# Altium PCB PCB1.PcbDoc
Units mil, origin at the board's own origin, x right, y up, seen from the top; angles counter-clockwise.
Board outline 6000 x 4000 mil, 2 copper layers (Top Layer, Bottom Layer); 33 components, 32 nets, 110 pads, 0 vias.
Unrouted connection lines stored in the file: 75.
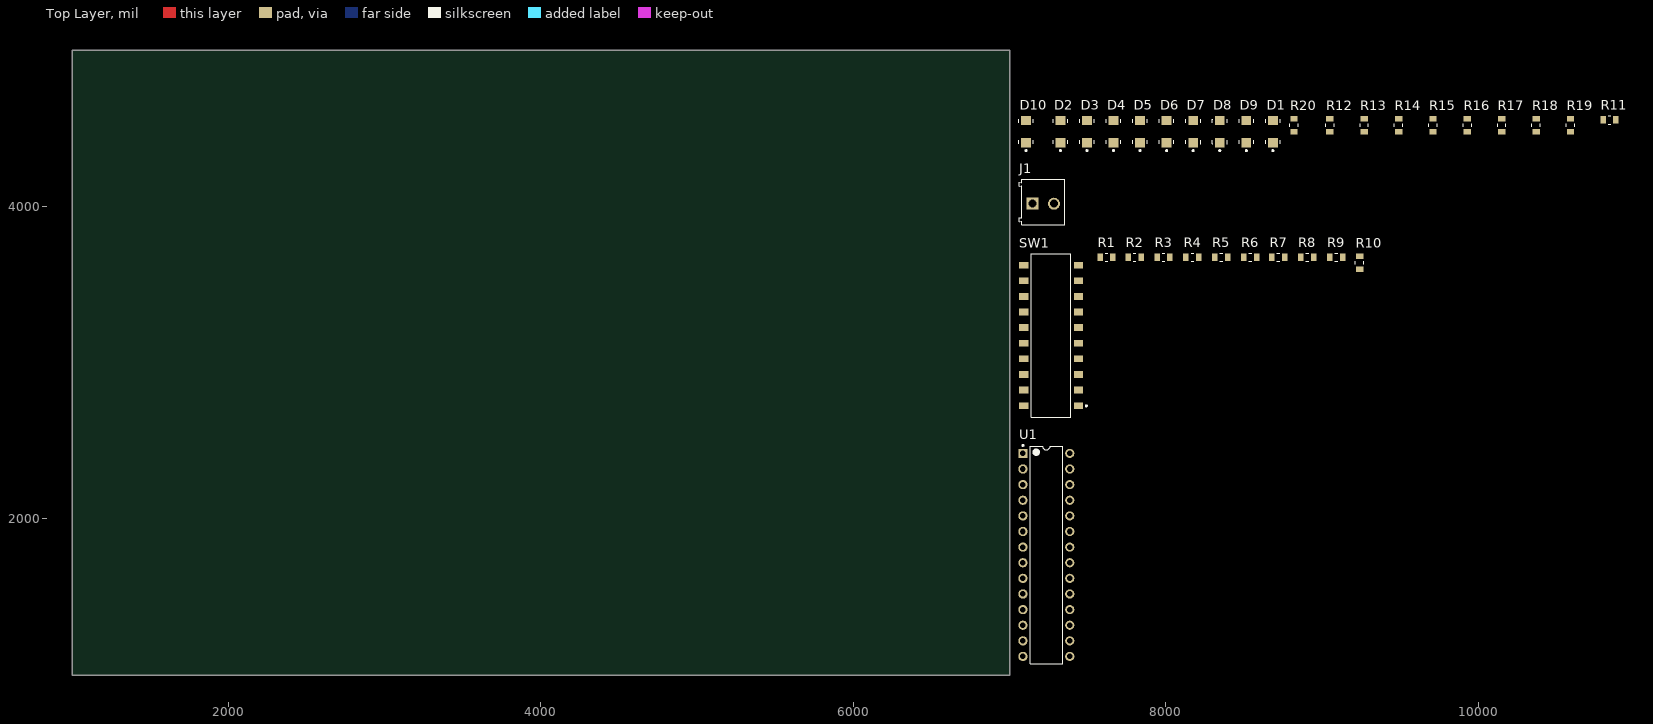
[diagram p0: Top Layer view]
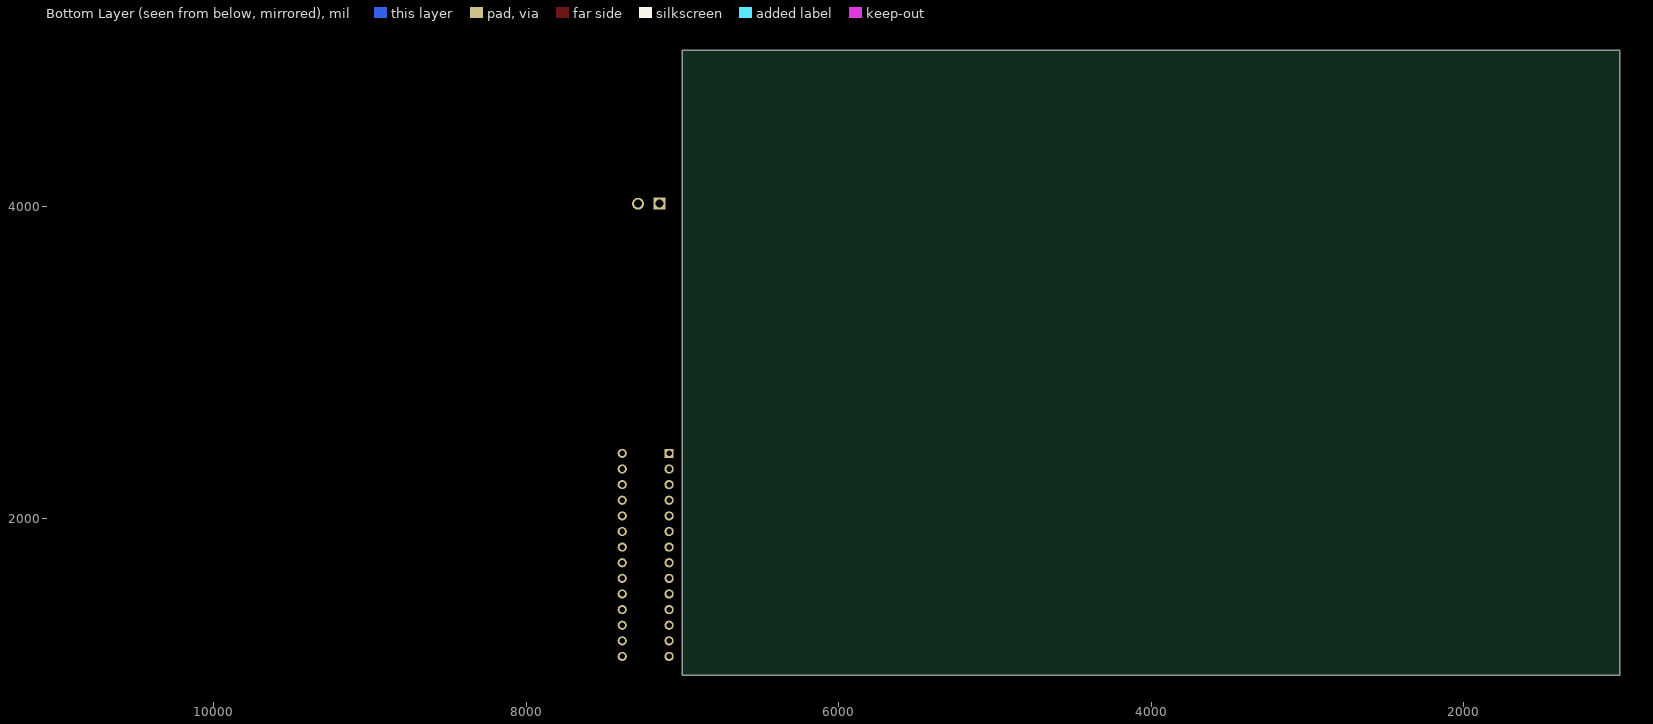
[diagram p1: Bottom Layer view, seen from below]

## Layer stack, top to bottom
Top Solder: solder mask 0.4, Solder Resist, Dk 3.5
Top Layer: signal copper 1.4
Dielectric 1: dielectric 12.6, FR-4, Dk 4.8
Bottom Layer: signal copper 1.4
Bottom Solder: solder mask 0.4, Solder Resist, Dk 3.5

## Board outline
1000,1000 7000,1000 7000,5000 1000,5000

## Design rules (kind name [scope] priority, off if disabled: settings)
Clearance [All] p1: gap=10 ignorepadtopadclearanceinfootprint=FALSE except(0: Arc-Hole Track-Hole SMDPad-Hole THPad-Hole Via-Hole Fill-Hole Poly-Hole Region-Hole Text-Hole)
PolygonConnect [All] p1: connectstyle=Relief reliefconductorwidth=10 reliefentries=4 polygonreliefangle="90 Angle" airgapwidth=10
RoutingVias [All] p1: holewidth=28 width=50 viastyle="Through Hole" minholewidth=28 minwidth=50 maxholewidth=28 maxwidth=50
SolderMaskExpansion [All] p1: expansion=4 istentingtop=FALSE
Width [All] p1: maxlimit=10 minlimit=10 preferedwidth=10
30 further rules are at their usual default settings.

## Classes and differential pairs
component class OD: D1 D2 D3 D4 D5 D6 D7 D8 D9 D10 R11 R12 R13 R14 R15 R16 R17 R18 R19 R20
component class MAIN: J1
component class ID: R1 R2 R3 R4 R5 R6 R7 R8 R9 R10 SW1
component class CPU: U1

## Components (designator, comment, footprint, x,y, rotation, side; value= is the part's Value field where it differs from the comment)
D1 "LTST-C230KRKT" FP-LTST-C230KRKT-MFG 8685,4480 r90 top
D2 "LTST-C230KRKT" FP-LTST-C230KRKT-MFG 7325,4480 r90 top
D3 "LTST-C230KRKT" FP-LTST-C230KRKT-MFG 7495,4480 r90 top
D4 "LTST-C230KRKT" FP-LTST-C230KRKT-MFG 7665,4480 r90 top
D5 "LTST-C230KRKT" FP-LTST-C230KRKT-MFG 7835,4480 r90 top
D6 "LTST-C230KRKT" FP-LTST-C230KRKT-MFG 8005,4480 r90 top
D7 "LTST-C230KRKT" FP-LTST-C230KRKT-MFG 8175,4480 r90 top
D8 "LTST-C230KRKT" FP-LTST-C230KRKT-MFG 8345,4480 r90 top
D9 "LTST-C230KRKT" FP-LTST-C230KRKT-MFG 8515,4480 r90 top
D10 "LTST-C230KRKT" FP-LTST-C230KRKT-MFG 7105,4480 r90 top
J1 "691214110002" 691214110002 7215,4030 r0 top
R1 "RT0805BRD07249RL" FP-RT0805-MFG 7620,3675 r0 top value=249Ω
R2 "RT0805BRD07249RL" FP-RT0805-MFG 7800,3675 r0 top value=249Ω
R3 "RT0805BRD07249RL" FP-RT0805-MFG 7985,3675 r0 top value=249Ω
R4 "RT0805BRD07249RL" FP-RT0805-MFG 8170,3675 r0 top value=249Ω
R5 "RT0805BRD07249RL" FP-RT0805-MFG 8355,3675 r0 top value=249Ω
R6 "RT0805BRD07249RL" FP-RT0805-MFG 8540,3675 r0 top value=249Ω
R7 "RT0805BRD07249RL" FP-RT0805-MFG 8720,3675 r0 top value=249Ω
R8 "RT0805BRD07249RL" FP-RT0805-MFG 8905,3675 r0 top value=249Ω
R9 "RT0805BRD07249RL" FP-RT0805-MFG 9090,3675 r0 top value=249Ω
R10 "RT0805BRD07249RL" FP-RT0805-MFG 9240,3640 r90 top value=249Ω
R11 "RT0805BRD07249RL" FP-RT0805-MFG 10840,4555 r0 top value=249Ω
R12 "RT0805BRD07249RL" FP-RT0805-MFG 9050,4520 r90 top value=249Ω
R13 "RT0805BRD07249RL" FP-RT0805-MFG 9270,4520 r90 top value=249Ω
R14 "RT0805BRD07249RL" FP-RT0805-MFG 9490,4520 r90 top value=249Ω
R15 "RT0805BRD07249RL" FP-RT0805-MFG 9710,4520 r90 top value=249Ω
R16 "RT0805BRD07249RL" FP-RT0805-MFG 9930,4520 r90 top value=249Ω
R17 "RT0805BRD07249RL" FP-RT0805-MFG 10150,4520 r90 top value=249Ω
R18 "RT0805BRD07249RL" FP-RT0805-MFG 10370,4520 r90 top value=249Ω
R19 "RT0805BRD07249RL" FP-RT0805-MFG 10590,4520 r90 top value=249Ω
R20 "RT0805BRD07249RL" FP-RT0805-MFG 8820,4520 r90 top value=249Ω
SW1 "A6S-0102-PH" FP-A6S-0102-PH-MFG 7265,3175 r90 top
U1 "ATmega328-PU" 28P3 7235,1770 r0 top

## Footprints (in the part's own frame and the unit in brackets; to place one, negate y for a bottom-side part, rotate by r counter-clockwise, add the part's x,y. Pads: shape width x height; smd on the part's side, far side on the other; paste and mask are expansions set on the pad)
28P3 [mm]
  rect 1.5x1.5 hole 0.9: 1(-3.81,16.51)
  round 1.5 hole 0.9: 2(-3.81,13.97) 3(-3.81,11.43) 4(-3.81,8.89) 5(-3.81,6.35) 6(-3.81,3.81) 7(-3.81,1.27) 8(-3.81,-1.27) 9(-3.81,-3.81) 10(-3.81,-6.35) 11(-3.81,-8.89) 12(-3.81,-11.43) 13(-3.81,-13.97) 14(-3.81,-16.51) 15(3.81,-16.51) 16(3.81,-13.97) 17(3.81,-11.43) 18(3.81,-8.89) 19(3.81,-6.35) 20(3.81,-3.81) 21(3.81,-1.27) 22(3.81,1.27) 23(3.81,3.81) 24(3.81,6.35) 25(3.81,8.89) 26(3.81,11.43) 27(3.81,13.97) 28(3.81,16.51)
  silkscreen extent -3.93,-17.7 2.65,17.93, body extent -3.6,-17.65 3.6,17.65, height 4.58
691214110002 [mm]
  rect 1.95x1.95 hole 1.3: 1(-1.75,-0.3)
  round 1.95 hole 1.3: 2(1.75,-0.3)
  silkscreen extent -3.9,-3.7 3.5,3.7, body extent -3.95,-3.7 3.5,3.7, height 8.55
FP-A6S-0102-PH-MFG [mm]
  rect 1.1x1.5 smd paste+0 mask+0: 1(-11.43,-4.45) 2(-8.89,-4.45) 3(-6.35,-4.45) 4(-3.81,-4.45) 5(-1.27,-4.45) 6(1.27,-4.45) 7(3.81,-4.45) 8(6.35,-4.45) 9(8.89,-4.45) 10(11.43,-4.45) 11(11.43,4.45) 12(8.89,4.45) 13(6.35,4.45) 14(3.81,4.45) 15(1.27,4.45) 16(-1.27,4.45) 17(-3.81,4.45) 18(-6.35,4.45) 19(-8.89,4.45) 20(-11.43,4.45)
  silkscreen extent -13.27,-5.88 13.27,3.2, body extent -13.37,-5.3 13.37,5.3, height 0.25
FP-LTST-C230KRKT-MFG [mm]
  rect 1.5x1.6 smd paste+0 mask+0: 1(-1.8,0) 2(1.8,0)
  silkscreen extent -3.22,-1.19 1.99,1.19, body extent -2.65,-0.95 2.65,0.95, height 0.25
FP-RT0805-MFG [mm]
  rect 0.9x1.2 smd paste+0 mask+0: 1(-1.05,0) 2(1.05,0)
  silkscreen extent -0.23,-0.67 0.23,0.67, body extent -1.6,-0.77 1.6,0.77, height 0.25

## Part data
D1 D2 D3 D4 D5 D6 D7 D8 D9 D10: library part CMP-22017-000041-1, "LED RED CLEAR CHIP SMD", Case Code (Imperial)=1206, Case Code (Metric)=3216, Color=Red, Forward Current=30mA, Forward Voltage=2V, Lens Color=Colorless, Max Operating Temperature=85°C, Min Operating Temperature=-55°C, Package Quantity=1, Power Dissipation=75mW, Reverse Voltage=5V, Test Current=20mA, Case/Package=1206, Depth=1.6mm, Dominant Wavelength=631nm, Height=1.1mm, Illumination Color=Red, Lead Free="Lead Free", Length=3.2mm, Lens Style=Diffused, Lens Transparency=Clear, Luminous Intensity=54mcd, Mount="Surface Mount", Number of Elements=1, Number of LEDs=1, Number of Pins=2, Packaging="Tape and Reel", Power Rating=75mW, Radiation Hardening=No, RoHS Compliant=Yes, Viewing Angle=130°, Wavelength=639nm, Width=1.6mm
J1: library part CMP-1502-02464-1, "Serie 2141 - 3.50 mm Horizontal Entry Modular with Rising Cage Clamp WR-TBL, 2 pin", Manufacturer="Wurth Elektronik", Operating Temperature=-40to105degC, Datasheet URL=http://katalog.we-online.de/em/datasheet/6912141100xx.pdf, Manufacturer URL=http://www.we-online.de, Mounting Technology=THT, Package Reference=691214110002, Packaging=Box, Part Number=691214110002, Pin Number=2, Pitch=3.50mm, Publisher=WurthElektronik
R1 R2 R3 R4 R5 R6 R7 R8 R9 R10 R11 R12 R13 R14 R15 R16 R17 R18 R19 R20: library part CMP-03412-035801-1, "RES SMD 249 OHM 0.1% 1/8W 0805", Manufacturer=Yageo, Package=RT0805, Power Rating=0.125W, Resistance=249Ω, Temperature="-55°C to +155°C", Temperature Coefficient="25 ppm/°C", Temperature Range High=+155°C, Temperature Range Low=-55°C, Tolerance=0.0025, Voltage Rating=150V, Automotive=No, Category=Res, ComponentLink2Description=Datasheet, ComponentLink2URL=http://www.yageo.com/documents/recent/PYu-RT_1-to-0.01_RoHS_L_9.pdf, Composition="Thin Film", Device Class L1="Passive Components", Device Class L2=Resistors, Device Class L3="Chip SMD Resistors", Digikey Description="RES SMD 249 OHM 0.1% 1/8W 0805", Footprint Url=http://www.yageo.com/exep/pages/download/literatures/PYu-R_Mount_10.pdf, Height=0.6mm, Ipc Land Pattern Name=RESC200125X50, Lead Free=Yes, Manufacturer Part Number=RT0805BRD07249RL, Mouser Description="Res SMD 249 Ohm .1% 0805", Octopart=https://octopart.com/rt0805brd07249rl-yageo-1410573, RoHS=TRUE, Series=RT
SW1: library part CMP-08827-000074-1, "SWITCH SLIDE DIP SPST 25MA 24V", Case/Package=DIP, Contact Resistance=200mR, Current Rating=25mA, Max Operating Temperature=70°C, Max Voltage Rating (DC)=24V, Min Operating Temperature=-20°C, Package Quantity=900, Actuator Length=0mm, Actuator Type="Slide (Standard)", Contact Plating=Gold, Electrical Life=1000Cycles, Length=1.037inch, Max Current Rating=25mA, Mechanical Life=1000Cycles, Mount="Surface Mount", Number of Positions=10, Orientation=Straight, Packaging="Tape and Reel", Pitch=0.1inch, Radiation Hardening=No, RoHS Compliant=Yes, Series=A6S-H, Terminal Pitch=2.54mm, Termination="Gull Wing", Throw Configuration=SPST, Voltage Rating (DC)=24V, Washable=Yes, Weight=0.87g
U1: library part CMP-0095-00015-2, "8-bit AVR Microcontroller, 32KB Flash, 1KB EEPROM, 2KB SRAM, 28-pin PDIP, Industrial Grade (-40°C to 85°C)", ComponentLink1Description="Manufacturer URL", ComponentLink1URL=http://www.atmel.com/, ComponentLink2Description="ATmega48A/48PA/88A/88PA/168A/168PA/328/328P Datasheet", ComponentLink2URL=http://www.atmel.com/dyn/resources/prod_documents/8271.pdf, ComponentLink3Description="ATmega48A/48PA/88A/88PA/168A/168PA/328/328P Summary", ComponentLink3URL=http://www.atmel.com/dyn/resources/prod_documents/8271S.pdf, DatasheetVersion="revD, May-2011", PackageDescription="28-lead (0.300\"/7.62mm Wide) Plastic Dual Inline Package (PDIP)", PackageReference=28P3, PackageVersion="revB, Sep-2001", RevisionNote="DatasheetVersion updated. URLs added."

## Nets (pads, with @x,y where several pads share a name; then routed paths per layer and width w, separated by ;. In a path a pad name is that pad's centre, name@x,y a point inside that pad or via, vN(x,y) a via of type N, cw(c..) or ccw(c..) an arc to the next point about the centre after c; other vN are vias at no path point)
GND: D1.1 D2.1 D3.1 D4.1 D5.1 D6.1 D7.1 D8.1 D9.1 D10.1 J1.2 SW1.1 SW1.2 SW1.3 SW1.4 SW1.5 SW1.6 SW1.7 SW1.8 SW1.9 SW1.10 U1.8 U1.22
INT1: R1.1 SW1.20 U1.5
INT2: R2.1 SW1.19 U1.6
INT3: R3.1 SW1.18 U1.11
INT4: R4.1 SW1.17 U1.12
INT5: R5.1 SW1.16 U1.13
INT6: R6.1 SW1.15 U1.14
INT7: R7.1 SW1.14 U1.15
INT8: R8.1 SW1.13 U1.16
INT9: R9.1 SW1.12 U1.17
INT10: R10.1 SW1.11 U1.18
NetD1_2: D1.2 R11.1
NetD2_2: D2.2 R12.1
NetD3_2: D3.2 R13.1
NetD4_2: D4.2 R14.1
NetD5_2: D5.2 R15.1
NetD6_2: D6.2 R16.1
NetD7_2: D7.2 R17.1
NetD8_2: D8.2 R18.1
NetD9_2: D9.2 R19.1
NetD10_2: D10.2 R20.1
Out1: R11.2 U1.23
Out2: R12.2 U1.24
Out3: R13.2 U1.25
Out4: R14.2 U1.26
Out5: R15.2 U1.27
Out6: R16.2 U1.28
Out7: R17.2 U1.1
Out8: R18.2 U1.2
Out9: R19.2 U1.3
Out10: R20.2 U1.4
VCC: J1.1 R1.2 R2.2 R3.2 R4.2 R5.2 R6.2 R7.2 R8.2 R9.2 R10.2 U1.7 U1.20 U1.21
pads on no net: U1.9 U1.10 U1.19